# Altium PCB PCB2.PcbDoc (part 1 of 3)
Units mil, origin at the board's own origin, x right, y up, seen from the top; angles counter-clockwise.
Board outline 11695.71 x 3821.7 mil, 2 copper layers (Top Layer, Bottom Layer), stack 16 mil thick; 124 components, 59 nets, 380 pads, 1798 vias.
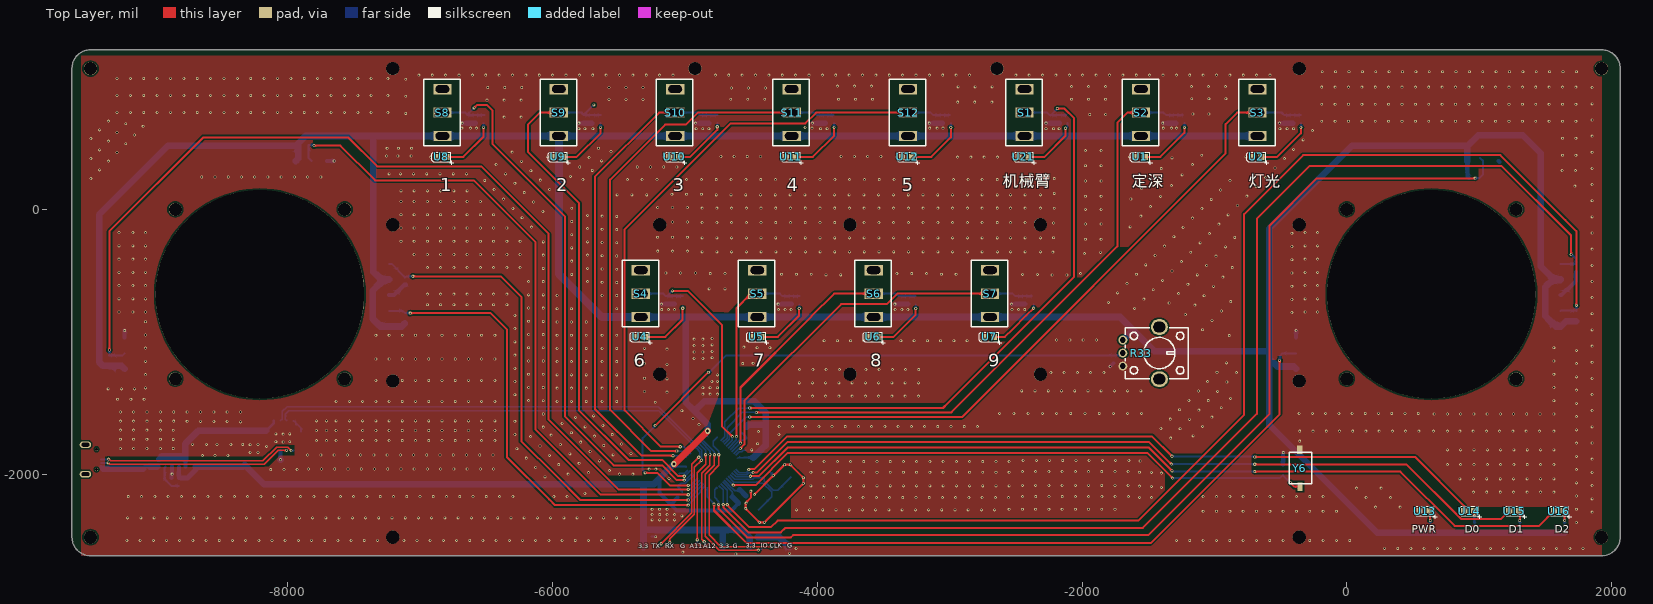
[diagram p0: Top Layer view]
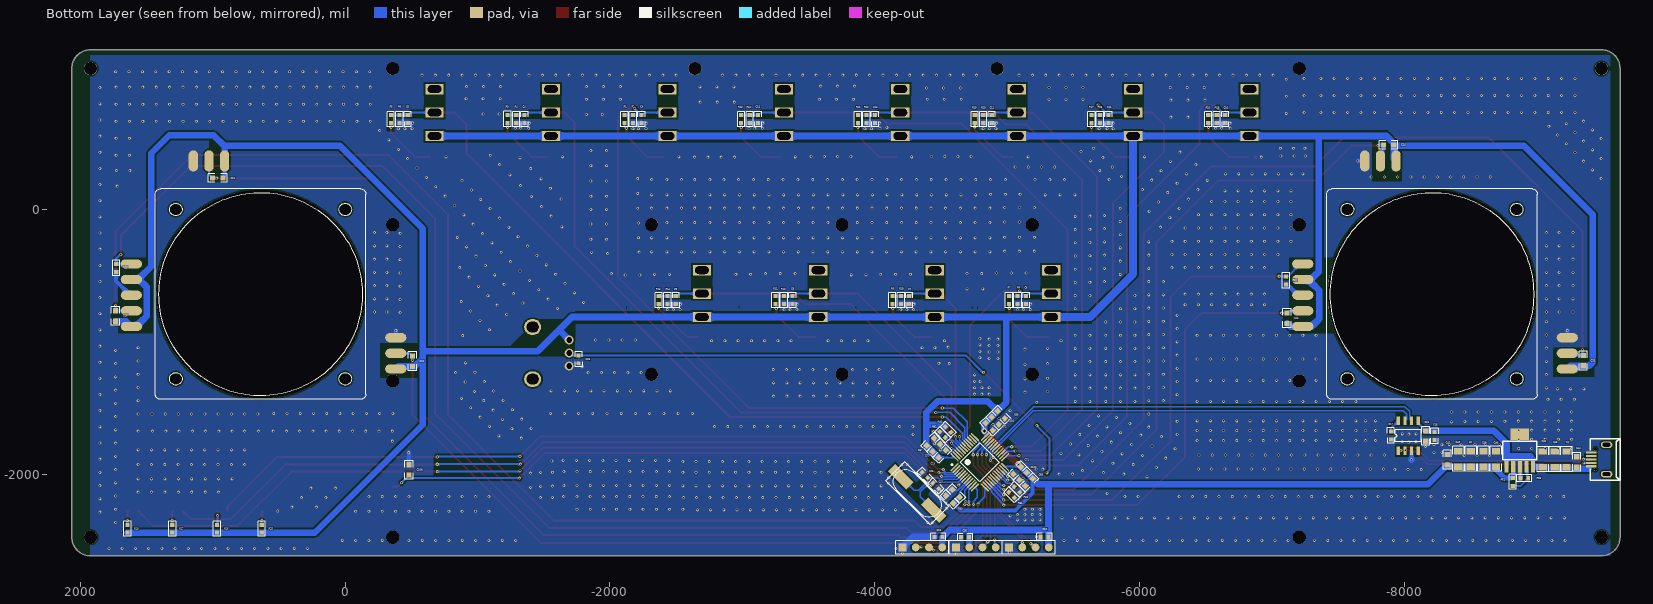
[diagram p1: Bottom Layer view, seen from below]

## Layer stack, top to bottom
Top Solder: solder mask 0.6, Solder Resist, Dk 3.5
Top Layer: signal copper 1.6
Dielectric 1: dielectric 12.8, FR-4, Dk 4.8
Bottom Layer: signal copper 1.6
Bottom Solder: solder mask 0.6, Solder Resist, Dk 3.5

## Board outline
-9630.47,-2476.93 -9630.47,1066.38 cw(c-9491.28,1066.38) -9491.28,1205.57 1926.04,1205.57 cw(c1926.04,1066.38) 2065.24,1066.38 2065.24,-2476.93 cw(c1926.04,-2476.93) 1926.04,-2616.12 -9491.28,-2616.12 cw(c-9491.28,-2476.93)

## Design rules (kind name [scope] priority, off if disabled: settings)
Clearance [All] p1: gap=6 ignorepadtopadclearanceinfootprint=TRUE except(0: Arc-Hole Track-Hole SMDPad-Hole THPad-Hole Via-Hole Fill-Hole Poly-Hole Region-Hole Text-Hole; 12: Arc-Fill Arc-Poly Arc-Region Track-Fill Track-Poly Track-Region SMDPad-Fill SMDPad-Poly SMDPad-Region THPad-Fill THPad-Poly THPad-Region Via-Fill Via-Poly Via-Region Fill-Fill Fill-Poly Fill-Region Poly-Poly Poly-Region Region-Region)
PlaneConnect [All] p1: planeconnectstyle=Direct reliefexpansion=20 reliefentries=4 reliefconductorwidth=10 reliefairgap=10
PolygonConnect [All] p1: connectstyle=Direct reliefconductorwidth=10 reliefentries=4 polygonreliefangle="90 Angle" airgapwidth=10
RoutingVias [All] p1: holewidth=28 width=50 viastyle="Through Hole" minholewidth=28 minwidth=50 maxholewidth=28 maxwidth=50
SolderMaskExpansion [All] p1: expansion=4 istentingtop=FALSE
Width pwr [InNetClass('pwr')] p1: maxlimit=60 minlimit=15 preferedwidth=15
Width [All] p2: maxlimit=15 minlimit=10 preferedwidth=10
29 further rules are at their usual default settings.

## Classes and differential pairs
net class pwr: +5V AGND VCC_3.3V
component class PART1: C1 C2 C3 C4 C5 C6 C7 C8 C9 C10 C11 C12 C13 C14 C17 C18 C19 C20 C21 C22 C23 C24 C25 C26 C27 C28 C30 C43 C44 C45 C46 C47 C48 C49 C66 C67 C68 C69 C70 C71 C72 C73 C102 C103 C104 C108 R1 R2 R3 R4 R5 R6 R7 R8 R9 R10 R11 R12 R13 R14 R15 R16 R17 R18 R19 R20 R21 R22 R23 R24 R25 R26 R27 R28 R30 R32 R40 R51 R81 R82 R83 R88

## Components (designator, comment, footprint, x,y, rotation, side; value= is the part's Value field where it differs from the comment)
C1 "CAP-CFR04R-C" 1206C -9212.56,-1883.88 r0 top value=10uf
C2 "CAP-CFR04R-C" 1206C -8490.47,-1881.12 r0 top value=10uf
C3 "CAP-CFR04R-C" 0603C -2239.29,680 r270 top value=104
C4 "CAP-CFR04R-C" 0603C -1357.14,680 r270 top value=104
C5 "CAP-CFR04R-C" 0603C -475,680 r270 top value=104
C6 "CAP-CFR04R-C" 0603C -5145.71,-687.03 r270 top value=104
C7 "CAP-CFR04R-C" 0603C -4263.57,-687.03 r270 top value=104
C8 "CAP-CFR04R-C" 0603C -3381.43,-687.03 r270 top value=104
C9 "CAP-CFR04R-C" 0603C -2499.29,-687.03 r270 top value=104
C10 "CAP-CFR04R-C" 0603C -6650,680 r270 top value=104
C11 "CAP-CFR04R-C" 0603C -5767.86,680 r270 top value=104
C12 "CAP-CFR04R-C" 0603C -4885.71,680 r270 top value=104
C13 "CAP-CFR04R-C" 0603C -4003.57,680 r270 top value=104
C14 "CAP-CFR04R-C" 0603C -3121.43,680 r270 top value=104
C15 "CAP-CFR04R-C" 0603C -8226.2,-1709.88 r90 top value=104
C16 "CAP-CFR04R-C" 0805C -8156.2,-1704.88 r90 top value=104
C17 "CAP-CFR04R-C" 0603C -7901.2,-1709.88 r270 top value=104
C18 "CAP-CFR04R-C" 0603C -4482.58,-2472.3 r180 top value=22pf
C19 "CAP-CFR04R-C" 0603C -5285,-2470 r180 top value=22pf
C20 "CAP-CFR04R-C" 0805C 1742.04,-798.01 r90 top value=104
C21 "CAP-CFR04R-C" 0805C 970,230 r0 top value=104
C22 "CAP-CFR04R-C" 0805C -500,-1140 r90 top value=104
C23 "CAP-CFR04R-C" 0805C -7106.54,-815 r90 top value=104
C24 "CAP-CFR04R-C" 0805C -7875,480 r0 top value=104
C25 "CAP-CFR04R-C" 0805C -9345,-1135 r90 top value=104
C26 "CAP-CFR04R-C" 0603C -4381.7,-2006.31 r225 top value=22pf
C27 "CAP-CFR04R-C" 0603C -4458.01,-2087.92 r45 top value=22pf
C28 "CAP-CFR04R-C" 0603C -1764.53,-1134 r270 top value=104
C30 "CAP-CFR04R-C" 0603C -4685,-2474.6 r180 top value=22pf
C43 "CAP-CFR04R-C" 1206C -9034.53,-1883.88 r0 top value=10uf
C44 "CAP-CFR04R-C" 0805C -9310,-1915 r270 top value=1uf
C45 "CAP-CFR04R-C" 1206C -9123.55,-1883.88 r0 top value=10uf
C46 "CAP-CFR04R-C" 1206C -8680.47,-1881.12 r0 top value=10uf
C47 "CAP-CFR04R-C" 0805C -8332.51,-1897.6 r270 top value=1uf
C48 "CAP-CFR04R-C" 1206C -8585.47,-1881.12 r0 top value=10uf
C49 "CAP-CFR04R-C" 1206C -8395.47,-1881.12 r0 top value=10uf
C66 "CAP-CFR04R-C" 0805C -4965.47,-1551.12 r225 top value=104
C67 "CAP-CFR04R-C" 0805C -4420.47,-1746.12 r135 top value=104
C68 "CAP-CFR04R-C" 0805C -5165.47,-2071.12 r315 top value=104
C69 "CAP-CFR04R-C" 0805C -4555.47,-2191.12 r45 top value=104
C70 "CAP-CFR04R-C" 0805C -4465.47,-1791.12 r135 top value=104
C71 "CAP-CFR04R-C" 0805C -5075.47,-1981.12 r315 top value=104
C72 "CAP-CFR04R-C" 0805C -4875.47,-1641.12 r225 top value=104
C73 "CAP-CFR04R-C" 0805C -4510.47,-1836.12 r135 top value=104
C102 "CAP-CFR04R-C" 0805C -5120.47,-2026.12 r315 top value=104
C103 "CAP-CFR04R-C" 0805C -4603.41,-2144.61 r45 top value=104
C104 "CAP-CFR04R-C" 0805C -4920.47,-1596.12 r225 top value=104
C108 "CAP-CFR04R-C" 0805C -475.47,-1960.52 r90 top value=104
J1 "MICRO_USB" MICRO_USB -9515.47,-1886.12 r0 bottom
P1 "HDR1X4" HDR1X4(2) -4755,-2560 r180 bottom
P2 "HDR1X4" HDR1X4(2) -5156,-2560 r180 bottom
P4 "HDR1X4" HDR1X4(2) -4351,-2560 r180 bottom
R1 "RES-WR1" 0603R -2119.29,679 r270 top value=2K
R2 "RES-WR1" 0603R -2184.03,679.11 r270 top value=20K
R3 "RES-WR1" 0603R -1236.86,680 r270 top value=2K
R4 "RES-WR1" 0603R -1302.01,679.11 r270 top value=20K
R5 "RES-WR1" 0603R -355,679 r270 top value=2K
R6 "RES-WR1" 0603R -420,679.11 r270 top value=20K
R7 "RES-WR1" 0603R -5025.71,-687.92 r270 top value=2K
R8 "RES-WR1" 0603R -5089.81,-687.92 r270 top value=20K
R9 "RES-WR1" 0603R -4143.57,-687.92 r270 top value=2K
R10 "RES-WR1" 0603R -4207.89,-687.92 r270 top value=20K
R11 "RES-WR1" 0603R -3261.43,-687.92 r270 top value=2K
R12 "RES-WR1" 0603R -3325.96,-687.92 r270 top value=20K
R13 "RES-WR1" 0603R -2379.29,-687.92 r270 top value=2K
R14 "RES-WR1" 0603R -2444.03,-687.92 r270 top value=20K
R15 "RES-WR1" 0603R -6530,679 r270 top value=2K
R16 "RES-WR1" 0603R -6594.1,679.11 r270 top value=20K
R17 "RES-WR1" 0603R -5647.86,679 r270 top value=2K
R18 "RES-WR1" 0603R -5712.09,679.11 r270 top value=20K
R19 "RES-WR1" 0603R -4765.71,679 r270 top value=2K
R20 "RES-WR1" 0603R -4830.5,679.11 r270 top value=20K
R21 "RES-WR1" 0603R -3883.57,679 r270 top value=2K
R22 "RES-WR1" 0603R -3948.06,679.11 r270 top value=20K
R23 "RES-WR1" 0603R -3001.43,679 r270 top value=2K
R24 "RES-WR1" 0603R -3066.04,679.11 r270 top value=20K
R25 "RES-WR1" 0603R 620,-2415 r270 top value=510R
R26 "RES-WR1" 0603R 958.33,-2415 r270 top value=510R
R27 "RES-WR1" 0603R 1296.67,-2415 r270 top value=510R
R28 "RES-WR1" 0603R 1635,-2415 r270 top value=510R
R29 "ROCKER" ROCKER#1 639.39,-641.12 r0 top
R30 "RES-WR1" 0603R 1720,-445 r270 top value=2K
R31 "ROCKER" ROCKER#2 -8210.47,-641.12 r0 top
R32 "RES-WR1" 0603R -7117.04,-540 r270 top value=2K
R33 "RK09K" RK09K_RES -1429.53,-1092.86 r270 top
R40 "RES-WR1" 0603R -4564.47,-1656.12 r225 top value=???
R51 "RES-WR1" 0603R -8810,-2055 r90 top value=510R
R81 "RES-WR1" 0603R -5025,-2161.34 r45 top value=???
R82 "RES-WR1" 0603R -4503.16,-1706.98 r45 top value=???
R83 "RES-WR1" 0603R -5085.47,-2109.09 r225 top value=???
R88 "RES-WR1" 0603R -8910,-2020 r180 top value=510R
S1 "TOGGLE_SW" TOGGLE_SWITCH -2412.06,727.66 r0 top
S2 "TOGGLE_SW" TOGGLE_SWITCH -1532.47,727.66 r0 top
S3 "TOGGLE_SW" TOGGLE_SWITCH -652.89,727.66 r0 top
S4 "TOGGLE_SW" TOGGLE_SWITCH -5310.82,-640 r0 top
S5 "TOGGLE_SW" TOGGLE_SWITCH -4431.24,-640 r0 top
S6 "TOGGLE_SW" TOGGLE_SWITCH -3551.65,-640 r0 top
S7 "TOGGLE_SW" TOGGLE_SWITCH -2672.06,-640 r0 top
S8 "TOGGLE_SW" TOGGLE_SWITCH -6810,727.66 r0 top
S9 "TOGGLE_SW" TOGGLE_SWITCH -5930.41,727.66 r0 top
S10 "TOGGLE_SW" TOGGLE_SWITCH -5050.82,727.66 r0 top
S11 "TOGGLE_SW" TOGGLE_SWITCH -4171.24,727.66 r0 top
S12 "TOGGLE_SW" TOGGLE_SWITCH -3291.65,727.66 r0 top
U1 "DS0" 0805D -1570.26,400 r0 top
U2 "DS0" 0805D -690.67,400 r0 top
U3 "STM32F103C" LQFP-48_M -4785.47,-1926.12 r135 top
U4 "DS0" 0805D -5348.61,-960 r0 top
U5 "DS0" 0805D -4469.02,-960 r0 top
U6 "DS0" 0805D -3589.44,-960 r0 top
U7 "DS0" 0805D -2709.85,-960 r0 top
U8 "DS0" 0805D -6847.79,400 r0 top
U9 "DS0" 0805D -5968.2,400 r0 top
U10 "DS0" 0805D -5088.61,400 r0 top
U11 "DS0" 0805D -4209.02,400 r0 top
U12 "DS0" 0805D -3329.44,400 r0 top
U13 "DS0" 0805D 579.8,-2275 r0 top
U14 "DS0" 0805D 918.2,-2275 r0 top
U15 "DS0" 0805D 1256.6,-2275 r0 top
U16 "DS0" 0805D 1595,-2275 r0 top
U17 "CH330" SOP_8 -8030.47,-1709.88 r90 top
U18 "TPS737" SOT-223-6_L6.5-W3.5-P1.27-BL -8865.47,-1851.12 r270 top
U21 "DS0" 0805D -2449.85,400 r0 top
Y1 "XTAL" XTAL3 -4320.41,-2146 r225 bottom
Y6 "KEY" KEY_3_6_2.5 -365.47,-1925.52 r0 top

## Footprints (in the part's own frame and the unit in brackets; to place one, negate y for a bottom-side part, rotate by r counter-clockwise, add the part's x,y. Pads: shape width x height; smd on the part's side, far side on the other; paste and mask are expansions set on the pad)
0603C [mil]
  rect 29.92x31.5 smd far side: 1(-32.03,2.3) 2(27.81,2.3)
0603R [mil]
  rect 29.92x31.5 smd far side: 1(26.92,10.5) 2(-32.92,10.5)
0805C [mm]
  rect 1x1 smd far side: 1(-1.181,0.179) 2(0.819,0.179)
0805D [mil]
  rect 47.24x47.24 smd: 1(45.2,-3.13) 2(-29.6,-3.13)
  silkscreen extent -65,-62 103,32
1206C [mm]
  rect 1.6x1.2 smd far side: 1(-0.335,1.402) 2(-0.335,-1.598)
HDR1X4(2) [mil]
  rect 59.06x59.06 smd: 1(-141,7)
  round 59.06 smd: 2(-41,7) 3(59,7) 4(159,7)
  silkscreen extent -191,-43 209,57
KEY_3_6_2.5 [mm]
  rect 1x1.6 smd: 1(0.302,-4.272) 2(0.27,2.806)
  silkscreen extent -1.76,-3.77 2.56,2.34
LQFP-48_M [mil]
  oval 82.68x11.81 smd far side: 1(-143.52,-113.96) 2(-143.52,-94.27) 3(-143.52,-74.59) 4(-143.52,-54.9) 5(-143.52,-35.22) 6(-143.52,-15.53) 7(-143.52,4.15) 8(-143.52,23.84) 9(-143.52,43.52) 10(-143.52,63.21) 11(-143.52,82.89) 12(-143.52,102.58) 25(179.32,102.58) 26(179.32,82.89) 27(179.32,63.21) 28(179.32,43.52) 29(179.32,23.84) 30(179.32,4.15) 31(179.32,-15.53) 32(179.32,-35.22) 33(179.32,-54.9) 34(179.32,-74.59) 35(179.32,-94.27) 36(179.32,-113.96)
  oval 11.81x82.68 smd far side: 13(-90.37,155.73) 14(-70.68,155.73) 15(-51,155.73) 16(-31.31,155.73) 17(-11.63,155.73) 18(8.06,155.73) 19(27.74,155.73) 20(47.43,155.73) 21(67.11,155.73) 22(86.8,155.73) 23(106.48,155.73) 24(126.17,155.73) 37(126.17,-167.11) 38(106.48,-167.11) 39(86.8,-167.11) 40(67.11,-167.11) 41(47.43,-167.11) 42(27.74,-167.11) 43(8.06,-167.11) 44(-11.63,-167.11) 45(-31.31,-167.11) 46(-51,-167.11) 47(-70.68,-167.11) 48(-90.37,-167.11)
MICRO_USB [mm]
  rect 2x0.4 smd: 1(2.618,1.362) 2(2.618,0.711) 3(2.618,0.061) 4(2.618,-0.588) 5(2.618,-1.237)
  oval 2.199x1.3 hole 0.7 slot 1.5 at 0 deg: 6(-0.332,-2.762) 7(-0.332,2.888)
  round 0.55 hole 0.55 unplated: $$$1(1.818,-1.886) $$$2(1.818,2.013)
  silkscreen extent -2.94,-3.96 2.81,4.04
RK09K_RES [mm]
  round 1.7 hole 1.1: 1(-2.703,-6.649) 2(-0.203,-6.649) 3(2.297,-6.649)
  oval 3x3.3 hole 2 slot 2.3 at 90 deg: 4(4.797,0.351) 5(-5.203,0.351)
  silkscreen extent -5.1,-6.15 4.7,5.85
ROCKER#1 [mil]
  oval 160x70 smd far side: 1(976.75,-242.74) 2(976.75,-124.62) 3(976.75,-6.51) 4(976.75,111.6) 5(976.75,229.71) 9(-1021.28,-563.6) 10(-1021.28,-445.49) 11(-1021.28,-327.38)
  oval 70x160 smd far side: 6(508.25,1007.26) 7(390.14,1007.26) 8(272.03,1007.26)
  round 98.43 hole 98.43: ""(-639.39,-638.41) ""(-639.39,641.12) ""(640.14,-638.41) ""(640.14,641.12)
  round 1574.8 hole 1574.8: ""(0,0)
ROCKER#2 [mil]
  oval 160x70 smd far side: 1(976.75,-242.74) 2(976.75,-124.62) 3(976.75,-6.51) 4(976.75,111.6) 5(976.75,229.71) 9(-1021.28,-563.6) 10(-1021.28,-445.49) 11(-1021.28,-327.38)
  oval 70x160 smd far side: 6(508.25,1007.26) 7(390.14,1007.26) 8(272.03,1007.26)
  round 98.43 hole 98.43: " "(-639.39,-638.41) " "(-639.39,641.12) " "(640.14,-638.41) " "(640.14,641.12)
  round 1574.8 hole 1574.8: " "(0,0)
SOP_8 [mil]
  rect 65x25 smd far side: 1(-112.2,-75) 2(-112.2,-25) 3(-112.2,25) 4(-112.2,75) 5(112.21,75) 6(112.21,25) 7(112.21,-25) 8(112.21,-75)
SOT-223-6_L6.5-W3.5-P1.27-BL [mil]
  rect 86.61x31.5 smd far side: 1(91.92,91.81) 2(91.92,41.81) 3(91.92,-8.19) 4(91.92,-58.19) 5(91.92,-108.19)
  rect 86.61x137.8 smd far side: 6(-152.08,-8.19)
TOGGLE_SWITCH [mm]
  rect 3.5x2 hole 1.5 slot 2.6 at 0 deg: 1(-0.562,4.614) 2(-0.562,0.114) 3(-0.562,-4.386)
  silkscreen extent -4.16,-6.24 2.84,6.46
XTAL3 [mm]
  rect 5x2 smd: 12(-4.5,0) 12(4.5,0)
  silkscreen extent -6,-2.5 6,2.6

## Part data
C1 C2 C3 C4 C5 C6 C7 C8 C9 C10 C11 C12 C13 C14 C15 C16 C17 C18 C19 C20 C21 C22 C23 C24 C25 C26 C27 C28 C30 C43 C44 C45 C46 C47 C48 C49 C66 C67 C68 C69 C70 C71 C72 C73 C102 C103 C104 C108: "RADIAL FILM CAPACITOR, MIL-SPEC SIZE CFR04R SIZE 'C'", Manufacturer #1=KEMET, Part Number=TBD, Tolerance=???, Sim.Analog.Order=Model$, Sim.Analog.Prefix=C, Voltage Rating=???
  C1 C2 C43 C45 C46 C48 C49: PCB DECAL=1206C
  C3 C4 C5 C6 C7 C8 C9 C10 C11 C12 C13 C14 C15 C17 C18 C19 C26 C27 C28 C30: PCB DECAL=0603C
  C16 C20 C21 C22 C23 C24 C25 C44 C47 C66 C67 C68 C69 C70 C71 C72 C73 C102 C103 C104 C108: PCB DECAL=0805C
R1 R2 R3 R4 R5 R6 R7 R8 R9 R10 R11 R12 R13 R14 R15 R16 R17 R18 R19 R20 R21 R22 R23 R24 R25 R26 R27 R28 R30 R32 R40 R51 R81 R82 R83 R88: "WIRE WOUND RESISTOR 3.4 X 7.05 MM", Manufacturer #1="IPC SM-782 STD.", PCB DECAL=0603R, Sim.Analog.Order=Model$, Sim.Analog.Prefix=R
U1 U2 U4 U5 U6 U7 U8 U9 U10 U11 U12 U13 U14 U15 U16 U21: library part LED, Comment_1=LED, PCB DECAL=0805D
U3: "STM32单片机48引脚", Comment_1=STM32F103C, PCB DECAL=LQFP-48_M
J1: PCB DECAL=MICRO-USB-SMD_5PBOARD5.9
P1 P2 P4: PCB DECAL=HDR1X4
R29 R31: PCB DECAL=ROCKER
R33: PCB DECAL=RK09K_RES
S1 S2 S3 S4 S5 S6 S7 S8 S9 S10 S11 S12: PCB DECAL=TOGGLE_SWITCH
U17: PCB DECAL=SOP-8
U18: PCB DECAL=SOT-223-6_L6.5-W3.5-P1.27-BL
Y1: PCB DECAL=XTAL
Y6: PCB DECAL=KEY_3_6_2.5

## Free pads (board coordinates)
  round 100 hole 100: " "(-9490.47,-2476.12) " "(-9490.47,1063.88) " "(-7207.47,-2476.12) " "(-7207.47,-1296.12) " "(-7207.47,-116.12) " "(-7207.47,1063.88) " "(-5190,-1245) " "(-5190,-115) " "(-4924.47,1063.88) " "(-3752.26,-1245) " "(-3752.26,-115) " "(-2641.47,1063.88) " "(-2314.51,-1245) " "(-2314.51,-115) " "(-358.47,-2476.12) " "(-358.47,-1296.12) " "(-358.47,-116.12) " "(-358.47,1063.88) " "(1924.53,-2476.12) " "(1924.53,1063.88)

## Via types
v1: diameter 22, hole 12, Top Layer to Bottom Layer, tented both sides, 1735 vias
v2: diameter 24, hole 12, Top Layer to Bottom Layer, tented both sides, 61 vias
v3: diameter 44, hole 22, Top Layer to Bottom Layer, tented both sides, 2 vias

## Nets (pads, with @x,y where several pads share a name; then routed paths per layer and width w, separated by ;. In a path a pad name is that pad's centre, name@x,y a point inside that pad or via, vN(x,y) a via of type N, cw(c..) or ccw(c..) an arc to the next point about the centre after c; other vN are vias at no path point)
+5V: C1.2 C15.2 C16.2 C43.2 C44.2 C45.2 J1.1 U17.5 U18.1 U18.5 | length 1516.6
  Bottom Layer w20: J1.1@-9412.42,-1939.76 -9392.18,-1960 ; C16.2@-8163.24,-1672.62 -8105.47,-1614.85 U17.5@-8105.47,-1597.68
  Bottom Layer w30: -9090.62,-1960 C43.2@-9073.66,-1943.04 ; C43.2@-9047.72,-1946.8 C43.2@-9043.96,-1943.04 ; U18.1@-8773.66,-1943.04 -8773.66,-1890.32
  Bottom Layer w40: -8973.66,-1886.15 -8953.63,-1866.12 ; -8773.76,-1890.22 -8773.66,-1890.32
  Bottom Layer w50: -9392.18,-1960 -9090.62,-1960 ; C43.2@-9043.96,-1943.04 U18.5@-8985,-1943.04 ; -8953.63,-1866.12 -8797.86,-1866.12 ; -8773.76,-1890.22 -8773.76,-1768.76 -8677.62,-1672.62 C15.2@-8228.5,-1672.62 ; C15.2@-8219.05,-1672.62 C16.2@-8163.24,-1672.62
ADC1: C20.2 R29.2 U3.10 | length 9678.2
  Top Layer w15: v2@-4684.5,-2229.61 -4514.11,-2400 -4350,-2400 -4300,-2350 -1575,-2350 -775,-1550 -775,-35 -330,410 1161.14,410 1651.14,-80 1735,-163.86 v2(1735,-725)
  Bottom Layer w10: U3.10@-4728.69,-2072.3 -4680.09,-2120.9 -4680.09,-2229.91 v2(-4680,-2230)
  Bottom Layer w15: R29.2@1616.14,-765.75 1617.06,-764.83 C20.2@1735,-764.83 ; C20.2@1735,-765.75 C20.2@1735,-764.83 ; v2(1735,-725) C20.2@1735,-764.83
ADC2: R29.5 R30.2 U3.11 | length 9238.3
  Top Layer w15: v2(-4710,-2230) -4710,-2250 -4520,-2440 -4275,-2440 -4240,-2405 -1540,-2405 -678.94,-1543.94 -678.94,-68.94 -280,330 1168.41,330 1680,-181.59 1695,-196.59 v2(1695,-340)
  Bottom Layer w10: U3.11@-4742.6,-2086.22 -4710,-2118.82 v2(-4710,-2230)
  Bottom Layer w15: R29.5@1616.14,-411.42 1616.81,-412.08 R30.2@1730.5,-412.08 1730.5,-370.5 1700,-340 v2(1695,-340)
ADC3: C21.2 R29.7 U3.12 | length 8147.2
  Top Layer w15: v2(-4745,-2228.17) -4745,-2261.84 -4529.94,-2476.9 -4200,-2476.9 -4183.1,-2460 -1499.19,-2460 -585,-1545.81 -585,-1417.33 -585,-125 -225,235 v1@970,235
  Bottom Layer w10: U3.12@-4756.53,-2100.14 -4774.5,-2118.12 -4774.5,-2175.74 -4742.6,-2207.63 -4745,-2210.03 v2(-4745,-2228.17)
  Bottom Layer w15: v1(970,237.04) C21.2@1002.26,237.04 1029.53,264.31 R29.7@1029.53,366.14 R29.7@1007.26,388.41
ADC4: C22.2 R29.10 U3.13 | length 5550.9
  Top Layer w15: v2(-4780,-2225.86) -4780,-2274.09 -4534.09,-2520 -1482.28,-2520 -507.81,-1545.53 v2(-507.81,-1140)
  Bottom Layer w10: U3.13@-4831.69,-2100.14 -4831.69,-2171.86 -4780,-2223.55 v2(-4780,-2225.86)
  Bottom Layer w15: v2(-507.81,-1140) -507.81,-1122.59 -500,-1114.78 C22.2@-507.04,-1107.74 -485.91,-1086.61 R29.10@-381.89,-1086.61
ADC5: C23.2 R31.2 U3.14 | length 3635
  Top Layer w15: v2(-7075.33,-782.74) -6467.26,-782.74 -6345,-905 -6345,-1870 -6025,-2190 -5981.45,-2233.55 v2(-4975,-2233.55)
  Bottom Layer w10: v2@-4980,-2233.55 -4884.59,-2138.13 -4884.59,-2125.19 U3.14@-4845.61,-2086.22
  Bottom Layer w15: R31.2@-7233.72,-765.75 -7130.57,-765.75 C23.2@-7113.58,-782.74 v2(-7075.33,-782.74)
ADC6: R31.5 R32.2 U3.15 | length 3973.2
  Top Layer w15: v2(-7055,-505) -6390,-505 -6235,-660 -6235,-1751.15 -5970.85,-2013.27 -5789.13,-2195 v2(-4975,-2195)
  Bottom Layer w10: v2@-4980,-2195 -4859.53,-2074.53 U3.15@-4859.53,-2072.3 v2@-4978.61,-2191.39
  Bottom Layer w15: R31.5@-7233.72,-411.42 -7215.16,-411.42 R32.2@-7119.5,-507.08 ; R32.2@-7121.71,-507.58 R32.2@-7114.29,-515 ; R32.2@-7104.29,-505 v2(-7055,-505)
ADC7: C24.2 R31.7 U3.16 | length 5062.8
  Top Layer w15: v2(-7802.04,482.04) -7602.04,482.04 -7340,220 -6594.88,220 -6130,-244.88 -6130,-1660 -5825,-1965 -5635,-2155 v2(-4975,-2155)
  Bottom Layer w10: v2(-4975,-2155) -4970.07,-2155 U3.16@-4873.45,-2058.38
  Bottom Layer w15: R31.7@-7820.34,366.14 -7842.74,388.55 C24.2@-7842.74,487.04 -7807.04,487.04 v2(-7802.04,482.04)
ADC8: C25.2 R31.10 U3.17 | length 7770.7
  Top Layer w15: v2(-9347.04,-1062.04) -9347.04,-165.23 -8636.81,545 -7545,545 -7325,325 -6540,325 -6030,-185 -6030,-1587.06 -5502.07,-2115 v2(-4975,-2115)
  Bottom Layer w10: v2(-4975,-2115) -4957.9,-2115 U3.17@-4887.37,-2044.46
  Bottom Layer w15: C25.2@-9352.04,-1102.74 C25.2@-9347.04,-1102.74 ; v2(-9347.04,-1062.04) C25.2@-9347.04,-1102.74 ; R31.10@-9231.75,-1086.61 -9247.88,-1102.74 C25.2@-9347.04,-1102.74
ADC9: C28.1 R33.2 U3.18 | length 4626.1
  Top Layer w15: v1(-5300,-1990) -5208.63,-1990 -5113.64,-2085 v2(-4975,-2085) ; v1(-5225,-1632.87) v1(-4822.13,-1230)
  Bottom Layer w10: v2(-4975,-2085) -4955.75,-2085 U3.18@-4901.29,-2030.54
  Bottom Layer w15: v1(-5300,-1990) -5320,-1970 -5320,-1727.87 v1(-5225,-1632.87) ; v1(-4822.13,-1230) -4814.11,-1230 -4686.07,-1101.97 C28.1@-1762.23,-1101.97 -1708.42,-1101.97 R33.2@-1691.32,-1084.86
ADC10: 